# Altium PCB PCB V2.PcbDoc
Units mm, origin at the board's own origin, x right, y up, seen from the top; angles counter-clockwise.
Board outline 200 x 120 mm, 2 copper layers (Top Layer, Bottom Layer), stack 1.671 mm thick; 82 components, 75 nets, 280 pads, 100 vias.
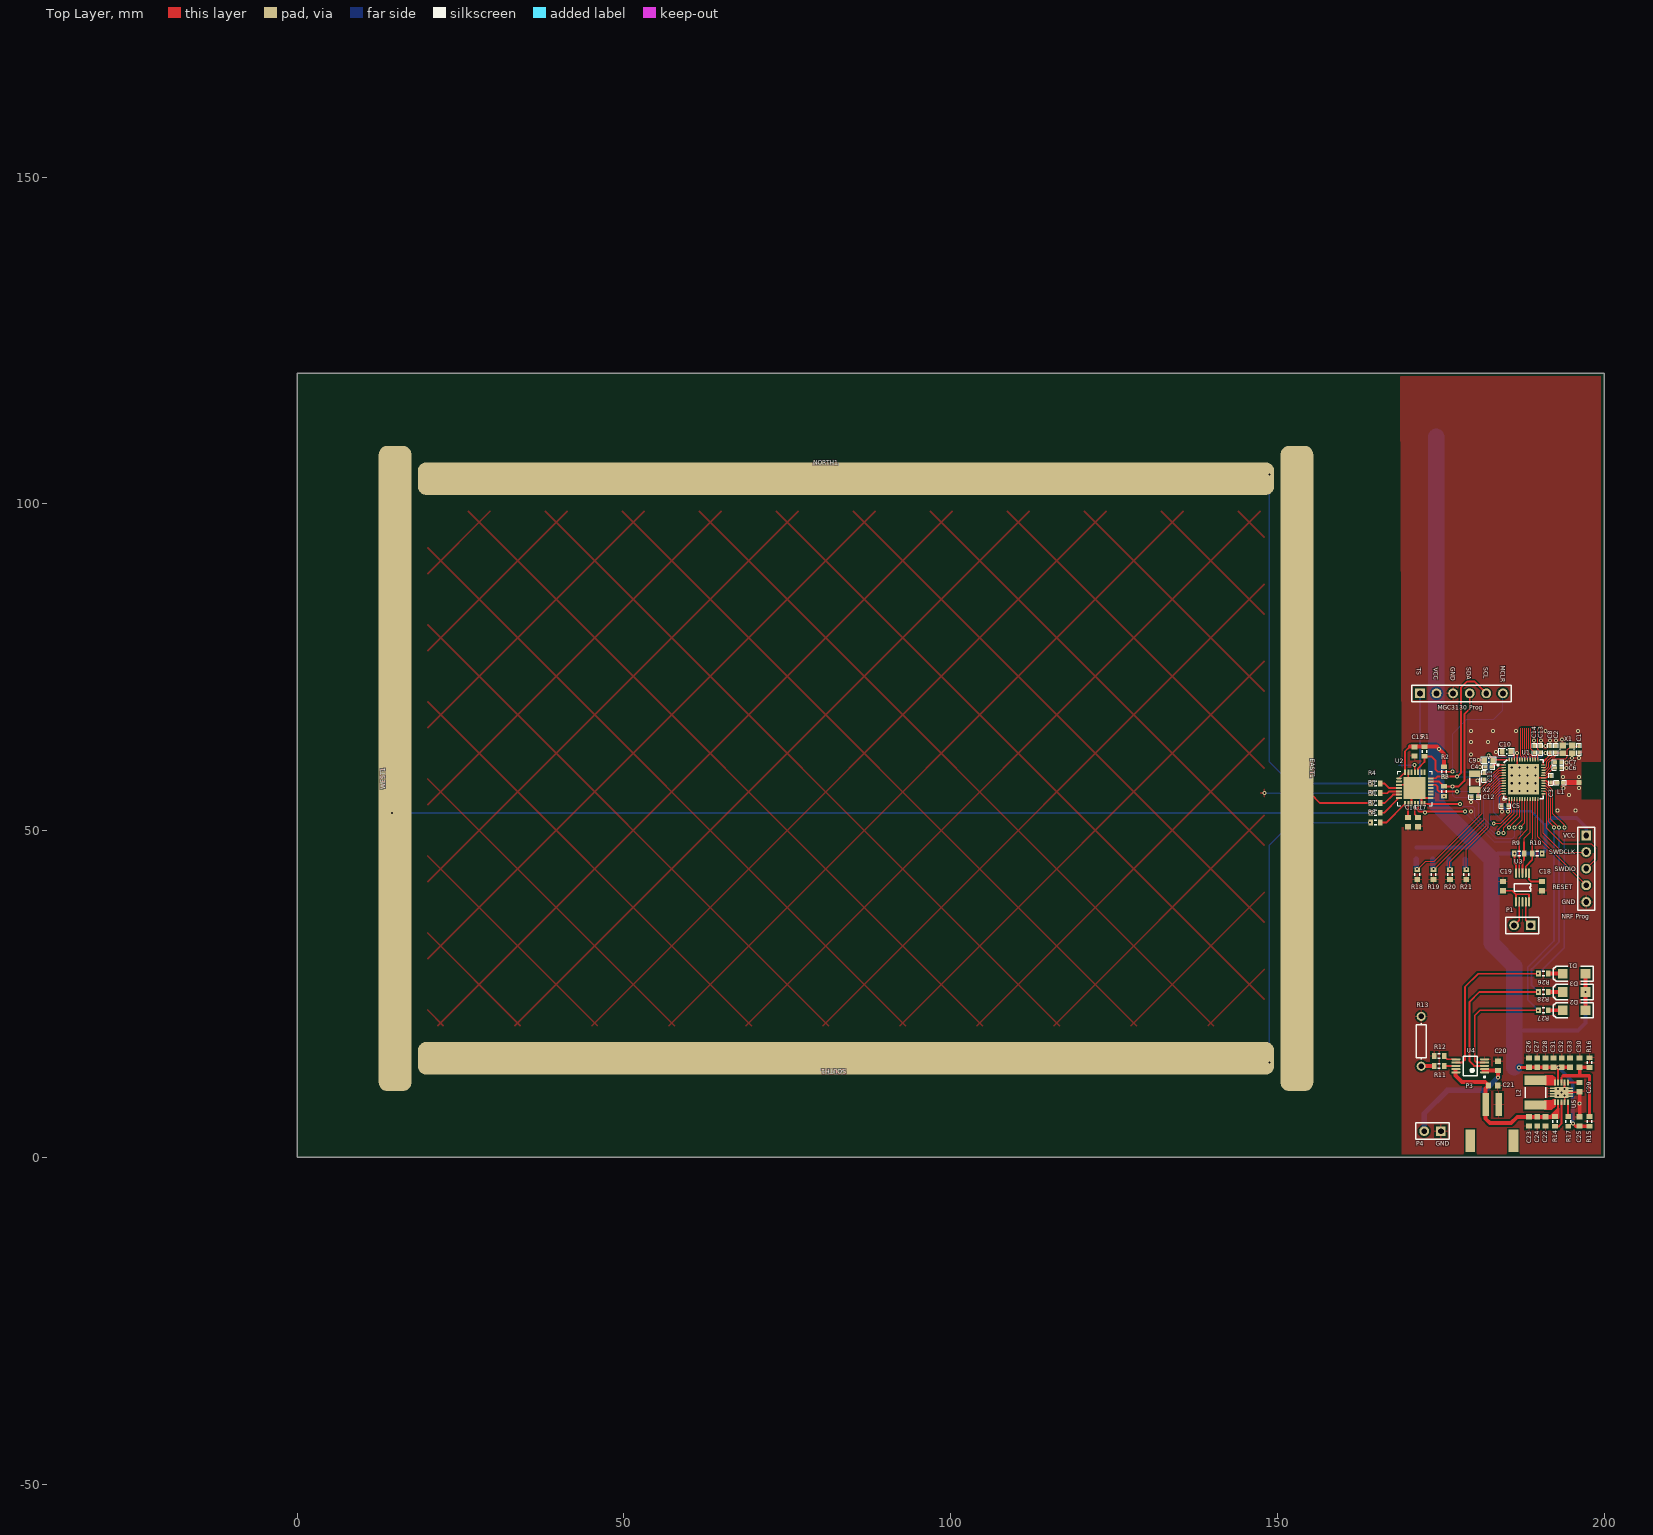
[diagram p0: Top Layer view]
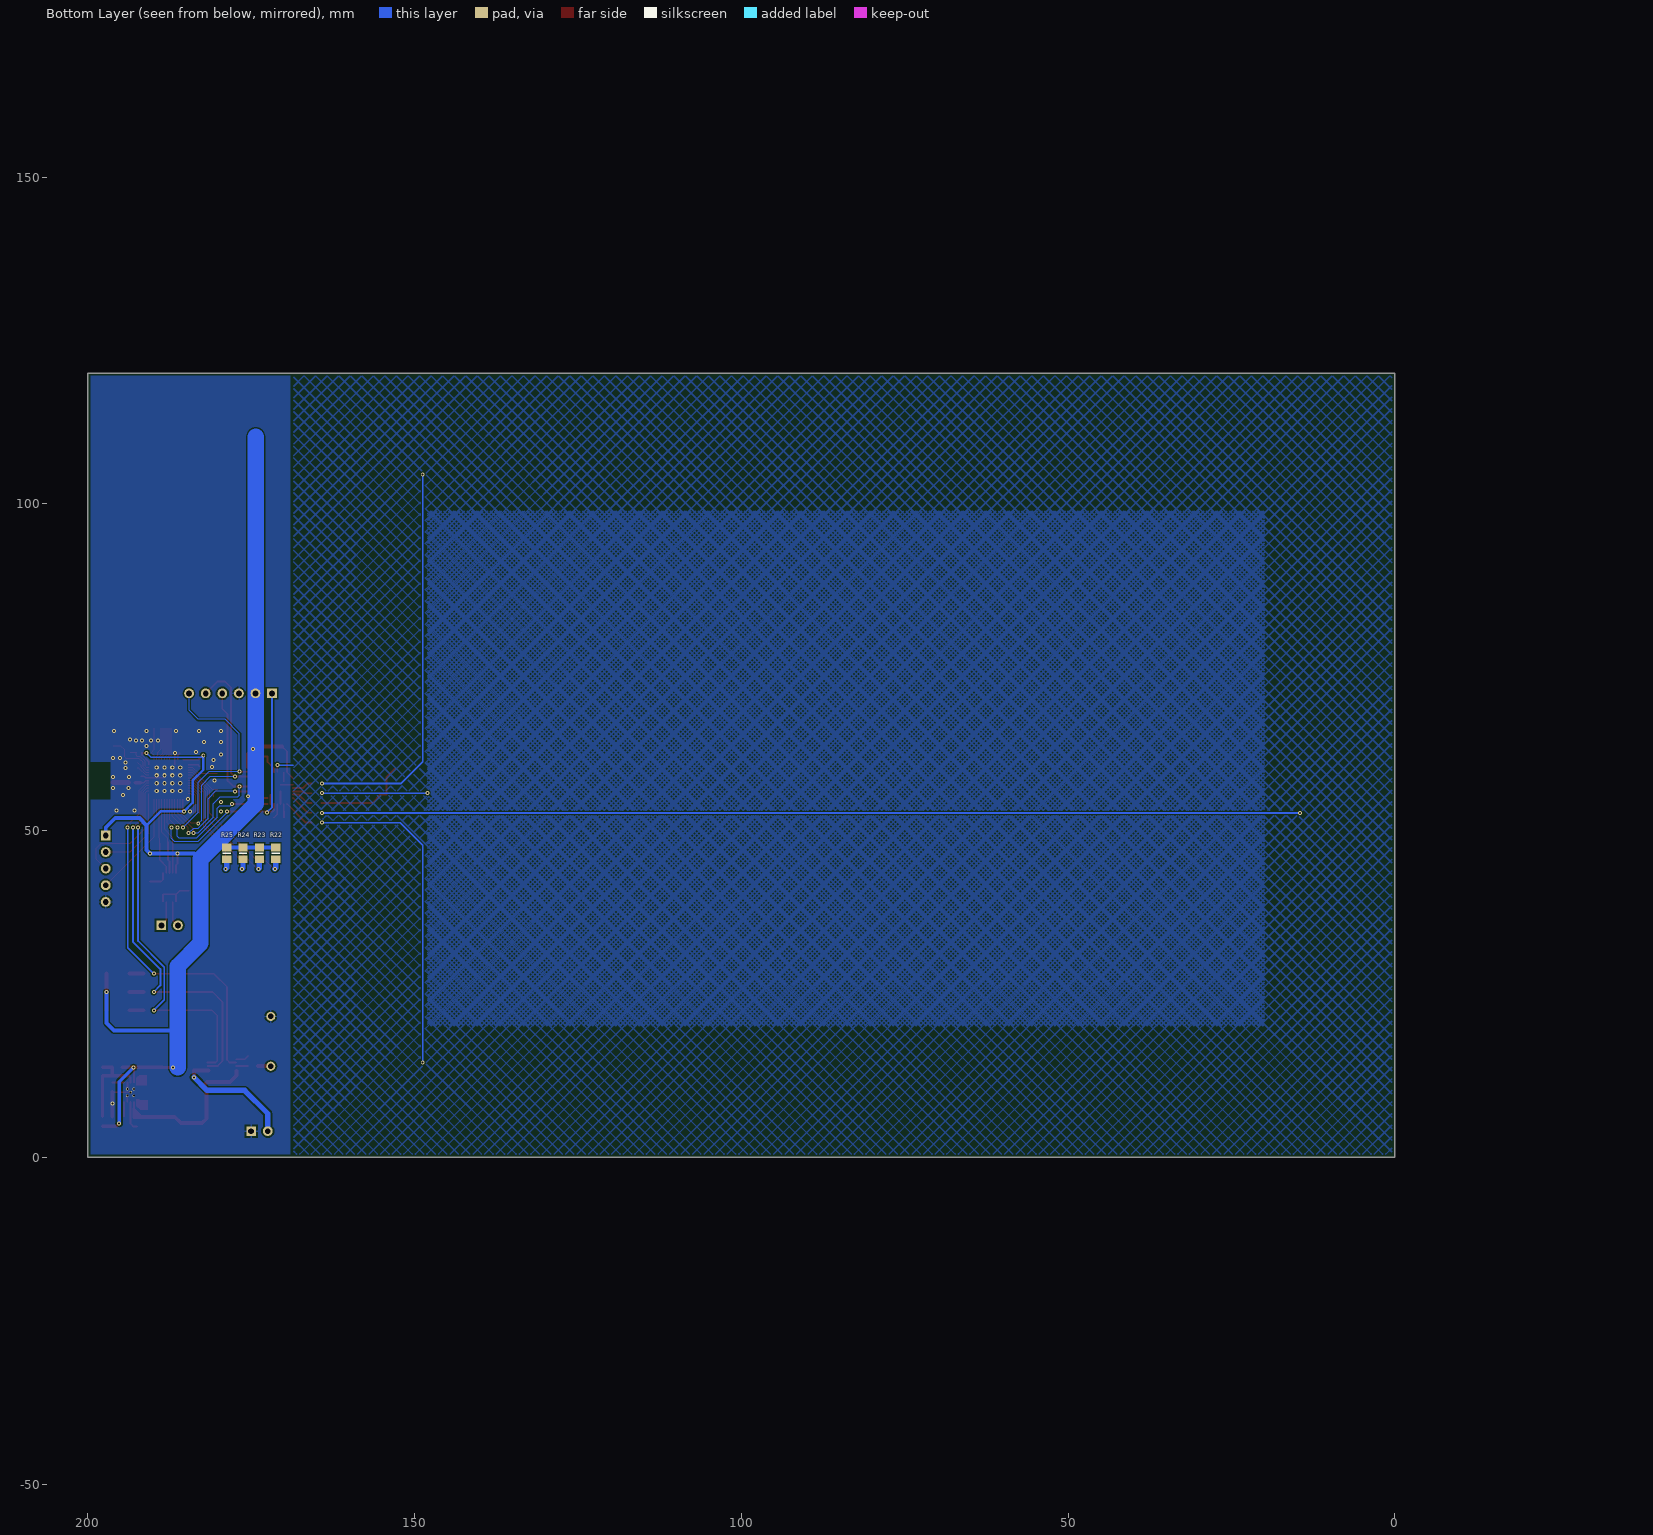
[diagram p1: Bottom Layer view, seen from below]

## Layer stack, top to bottom
Top Solder: solder mask 0.0102, Solder Resist, Dk 3.5
Top Layer: signal copper 0.0356
Dielectric1: core 1.6002, FR-4, Dk 4.8
Bottom Layer: signal copper 0.0356
Bottom Solder: solder mask 0.0102, Solder Resist, Dk 3.5

## Board outline
0,0 0,120 200,120 200,0

## Design rules (kind name [scope] priority, off if disabled: settings)
Clearance Polygon_ANT [(InNamedPolygon('Top_Layer-GND')) or (InNamedPolygon('Bottom_Layer-GND')) vs InNet('RF')] p1: gap=0.127
Clearance Polygon [(InNamedPolygon('Top_Layer-GND')) or (InNamedPolygon('Bottom_Layer-GND'))] p2: gap=0.254
Clearance [All] p3: gap=0.152
ComponentClearance [All] p1 off: gap=0.254 collisioncheckmode=3 verticalgap=0.254 showdistances=FALSE
FabricationTestPointUsage TestPointUsage [All] p1: valid=0 allowmultiple=FALSE
FabricationTestpoint Testpoint [All] p1: side=3 testpointundercomponent=TRUE minsize=1.016 maxsize=2.54 preferedsize=1.524 minholesize=0 maxholesize=1.016 preferedholesize=0.813 testpointgrid=0.025 allowsidetop=TRUE allowsidebottom=TRUE usegrid=TRUE gridtolerance=0
Height [All] p1 off: minheight=0 maxheight=25.4 prefheight=12.7
HoleSize [All] p1: absolutevalues=TRUE maxlimit=4.064 minlimit=0.305 maxpercent=80.000 minpercent=20.000
MinimumAnnularRing [All] p1 off: minimumring=0.152
PolygonConnect PolygonConnect_1 [isVia and innet(gnd)] p1: connectstyle=Direct reliefconductorwidth=0.254 reliefentries=4 polygonreliefangle="90 Angle" airgapwidth=0.254
PolygonConnect [All] p2: connectstyle=Relief reliefconductorwidth=0.254 reliefentries=4 polygonreliefangle="90 Angle" airgapwidth=0.254
RoutingVias [All] p1: holewidth=0.406 width=0.813 viastyle="Through Hole" minholewidth=0.254 minwidth=0.254 maxholewidth=0.711 maxwidth=1.27
SilkToSolderMaskClearance SilkscreenOverComponentPads [IsPad] p1: minsilkscreentomaskgap=0.254 clearancetoexposedcopper=TRUE
SolderMaskExpansion [All] p1: expansion=0.076
Width [All] p1: maxlimit=2.54 minlimit=0.152 preferedwidth=0.152
24 further rules are at their usual default settings.

## Classes and differential pairs
component class U_TPS63060: C22 C23 C24 C25 C26 C27 C28 C29 C30 C31 C32 C33 L2 R14 R15 R16 R17 U5
component class U_MCP73833: C20 C21 P3 P4 R11 R12 R13 U4
component class Overview: D1 D2 D3 "MGC3130 Prog" "NRF Prog" R18 R19 R20 R21 R22 R23 R24 R25 R26 R27 R28
component class U_DRV2605L: C18 C19 P1 R9 R10 U3
component class U_MGC3130: C15 C16 C17 EAST1 NORTH1 R1 R2 R3 R4 R5 R6 R7 R8 SOUTH1 U2 WEST1

## Components (designator, comment, footprint, x,y, rotation, side; value= is the part's Value field where it differs from the comment)
C1 "Cap Semi" CAPC1005X04L 196.152,62.437 r270 top
C2 "12pF" CAPC1005X04L 192.596,62.437 r90 top
C3 "Cap Semi" CAPC1005X04L 191.855,57.84 r270 top
C4 "Cap Semi" INDC1005X04L 182.33,59.719 r180 top
C5 "100nF" CAPC1005X04L 184.819,53.75 r180 top
C6 "N.C." CAPC1005X04L 192.947,59.567 r180 top
C7 "100pF" CAPC1005X04L 192.947,60.456 r0 top
C8 "100nF" CAPC1005X04L 191.707,62.437 r90 top
C9 "4.7µF" CAPC1608X06L 182.33,60.761 r180 top
C10 "1.0µF" CAPC1608X06L 185.077,62.056 r0 top
C11 "12pF" CAPC1005X04L 181.619,58.297 r270 top
C12 "12pF" CAPC1005X04L 180.197,55.147 r180 top
C13 "12pF" CAPC1005X04L 190.284,62.437 r90 top
C14 "12pF" CAPC1005X04L 189.319,62.44 r90 top
C15 "Cap Semi" 1608[0603] 171,62.1 r90 top
C16 "Cap Semi" 1608[0603] 170,51.3 r90 top
C17 "Cap Semi" 1608[0603] 171.5,51.3 r270 top
C18 "Cap Semi" 1608[0603] 190.5,41.5 r270 top
C19 "Cap Semi" 1608[0603] 184.5,41.5 r270 top
C20 "Cap Semi" 1608[0603] 183.75,14 r90 top
C21 "Cap Semi" 1608[0603] 183,11 r180 top
C22 "Cap Semi" 1608[0603] 191,5.5 r90 top
C23 "Cap Semi" 1608[0603] 188.5,5.5 r90 top
C24 "Cap Semi" 1608[0603] 189.75,5.5 r90 top
C25 "Cap Semi" 1608[0603] 196.25,5.5 r270 top
C26 "Cap Semi" 1608[0603] 188.5,14.5 r270 top
C27 "Cap Semi" 1608[0603] 189.75,14.5 r270 top
C28 "Cap Semi" 1608[0603] 191,14.5 r270 top
C29 "Cap Semi" 1608[0603] 196.25,10.75 r90 top
C30 "Cap Semi" 1608[0603] 196.25,14.5 r270 top
C31 "Cap Semi" 1608[0603] 192.25,14.5 r270 top
C32 "Cap Semi" 1608[0603] 193.5,14.5 r270 top
C33 "Cap Semi" 1608[0603] 194.75,14.5 r270 top
D1 "LED2" 3.2X1.6X1.1 195.4,28.1 r180 top
D2 "LED2" 3.2X1.6X1.1 195.4,22.5 r180 top
D3 "LED2" 3.2X1.6X1.1 195.4,25.3 r180 top
EAST1 "Antenna" "Vertical Electrode"#1 152.988,58.504 r0 top
L1 "3.9nH" INDC1005X04L 193.278,57.332 r0 top
L2 "Inductor" INDC4532 189.492,9.893 r90 top
"MGC3130 Prog" "MGC3130 Programming Header" HDR1X6 171.8,71 r0 top (schematic designator P5)
NORTH1 "Antenna" "Horizontal Electrode"#1 82.988,106.504 r180 top
"NRF Prog" "Programming Header" HDR1X5 197.25,49.25 r270 top (schematic designator P2)
P1 "Vibration Motor" HDR1X2 188.75,35.5 r180 top
P3 "Header 2" JST-PH-2 180.25,4.25 r0 top
P4 "Header 2" HDR1X2 175,4 r180 top
R1 "Res3" J1-0603 172.5,62.1 r90 top
R2 "Res3" J1-0603 175.5,59 r90 top
R3 "Res3" J1-0603 175.5,56 r270 top
R4 "Res3" J1-0603 165,57.219 r0 top
R5 "Res3" J1-0603 165,55.719 r0 top
R6 "Res3" J1-0603 165,54.219 r0 top
R7 "Res3" J1-0603 165,52.719 r0 top
R8 "Res3" J1-0603 165,51.219 r0 top
R9 "Res3" J1-0603 187,46.5 r180 top
R10 "Res3" J1-0603 189.75,46.5 r0 top
R11 "Res3" J1-0603 174.75,14 r180 top
R12 "Res3" J1-0603 174.75,15.5 r0 top
R13 "NTC Thermistor" AXIAL-0.3 172,17.75 r270 top
R14 "Res3" J1-0603 192.5,5.5 r270 top
R15 "Res3" J1-0603 197.75,5.5 r270 top
R16 "Res3" J1-0603 197.75,14.5 r270 top
R17 "Res3" J1-0603 194.5,5.5 r270 top
R18 "Res3" J1-0603 171.393,43.258 r90 top
R19 "Res3" J1-0603 173.893,43.258 r90 top
R20 "Res3" J1-0603 176.393,43.258 r90 top
R21 "Res3" J1-0603 178.893,43.258 r90 top
R22 "Strain" 6-0805_N 171.25,46.5 r270 bottom
R23 "Strain" 6-0805_N 173.75,46.5 r270 bottom
R24 "Strain" 6-0805_N 176.25,46.5 r270 bottom
R25 "Strain" 6-0805_N 178.75,46.5 r270 bottom
R26 "Res3" J1-0603 190.7,28.1 r180 top
R27 "Res3" J1-0603 190.7,22.5 r180 top
R28 "Res3" J1-0603 190.7,25.3 r180 top
SOUTH1 "Antenna" "Horizontal Electrode"#2 82.488,12.504 r180 top
U1 "MGC3130" QFN40P600X600X90-48N 187.664,57.84 r0 top locked
U2 "MGC3130" QFN28 171,56.5 r0 top
U3 "DRV2605L" DRV2605L 188.5,43.5 r270 top
U4 "MCP73833" TSSOP50P490X110-10N 179.5,14 r180 top
U5 "TPS63060" S-PSWON-N10 193.45,9.95 r0 top
WEST1 "Antenna" "Vertical Electrode"#2 16.988,57.004 r0 top
X1 "32MHz" BT-XTAL_2016 194.374,62.437 r180 top
X2 "32.768kHz" XTAL_3215 180.197,57.459 r270 top

## Footprints (in the part's own frame and the unit in brackets; to place one, negate y for a bottom-side part, rotate by r counter-clockwise, add the part's x,y. Pads: shape width x height; smd on the part's side, far side on the other; paste and mask are expansions set on the pad)
3.2X1.6X1.1 [mm] "SMT LED; 2 Flat Leads"
  rect 1.5x1.5 smd: 1(-1.75,0) 2(1.75,0)
  silkscreen extent -2.9,-1.15 3.2,1.15
6-0805_N [mm] "Chip Resistor, Body 2.0x1.2mm, IPC Medium Density"
  rect 1.2x1.4 smd: 1(-0.9,0) 2(0.9,0)
  silkscreen extent 0,-0.6 0,0.6, body extent -1.07,-0.7 1.07,0.7, height 0.7
1608[0603] [mm] "Chip Capacitor, Body 1.6x0.8mm, IPC High Density"
  rect 0.8x0.9 smd: 1(-0.7,0) 2(0.7,0)
  body extent -0.87,-0.48 0.87,0.48, height 1.3
AXIAL-0.3 [mm] "Axial Device, Thru-Hole; 2 Leads; 0.3 in Pin Spacing"
  round 1.4 hole 0.85: 1(-3.81,0) 2(3.81,0)
  silkscreen extent -2.77,-0.76 2.77,0.76
BT-XTAL_2016 [mm] "Crystal 2.0 x 1.6 mm"
  rect 0.95x0.85 smd: 1(-0.725,-0.575) 2(0.725,-0.575) 3(0.725,0.575) 4(-0.725,0.575)
  silkscreen extent -1.08,-0.88 1.08,0.88
CAPC1005X04L [mm] "Chip Capacitor, Body 1.6x0.8mm, IPC High Density"
  rect 0.6x0.5 smd: 1(-0.5,0) 2(0.5,0)
  silkscreen extent -0.9,-0.35 0.9,0.35, body extent -0.51,-0.25 0.51,0.25, height 0.5
CAPC1608X06L [mm] "Chip Capacitor, 2-Leads, Body 1.6x0.8mm, IPC High Density"
  rect 0.75x0.8 smd: 1(-0.675,0) 2(0.675,0)
  silkscreen extent -1.17,-0.5 1.17,0.5, body extent -0.8,-0.43 0.8,0.43, height 0.8
DRV2605L [mm]
  rect 1.45x0.3 smd: 1(0,0)
  oval 1.45x0.3 smd: 2(0,-0.5) 3(0,-1) 4(0,-1.5) 5(0,-2) 6(4.4,-2) 7(4.4,-1.5) 8(4.4,-1) 9(4.4,-0.5) 10(4.4,0)
  silkscreen extent 1.61,-2.25 2.79,0.25
HDR1X2 [mm] "Connector; Header; 2 Position"
  rect 1.5x1.5 hole 0.9: 1(0,0)
  round 1.5 hole 0.9: 2(2.54,0)
  silkscreen extent -1.27,-1.27 3.81,1.27
HDR1X5 [mm] "Connector; Header; 5 Position"
  rect 1.5x1.5 hole 0.9: 1(0,0)
  round 1.5 hole 0.9: 2(2.54,0) 3(5.08,0) 4(7.62,0) 5(10.16,0)
  silkscreen extent -1.27,-1.27 11.43,1.27
HDR1X6 [mm] "Connector; Header; 6 Position"
  rect 1.5x1.5 hole 0.9: 1(0,0)
  round 1.5 hole 0.9: 2(2.54,0) 3(5.08,0) 4(7.62,0) 5(10.16,0) 6(12.7,0)
  silkscreen extent -1.27,-1.27 13.97,1.27
"Horizontal Electrode"#1 [mm]
  rrect50% 131x5 smd paste+0 mask-300: 1(-1,2.65)
"Horizontal Electrode"#2 [mm]
  rrect50% 131x5 smd paste+0 mask-300: 1(-1.5,-2.65)
INDC1005X04L [mm] "Chip Capacitor, Body 1.6x0.8mm, IPC High Density"
  rect 0.65x0.5 smd: 1(-0.475,0) 2(0.475,0)
  silkscreen extent -0.9,-0.35 0.9,0.35, body extent -0.5,-0.3 0.5,0.3, height 0.5
INDC4532 [mm] "Chip Inductor, Body 4.5x3.2mm, IPC High Density"
  rect 1.4x3.3 smd: 1(-1.9,0) 2(1.9,0)
  silkscreen extent -0.8,-1.55 0.8,1.55, body extent -2.4,-1.7 2.4,1.7, height 0.55
J1-0603 [mm] "Chip Resistor, Body 1.6x0.8mm, IPC High Density"
  rect 0.7x0.9 smd: 1(-0.75,0) 2(0.75,0)
  silkscreen extent -0.2,-0.35 0.2,0.35, body extent -0.85,-0.48 0.85,0.48, height 0.9
JST-PH-2 [mm]
  rect 1x3.5 smd: 1(1.6,3.85) 2(3.6,3.85)
  rect 1.5x3.4 smd: ""(-0.75,-1.7) ""(5.85,-1.7)
QFN28 [mm]
  oval 0.85x0.3 smd: 1(-2.4,1.5)
  rect 0.85x0.3 smd: 2(-2.4,1) 3(-2.4,0.5) 4(-2.4,0) 5(-2.4,-0.5) 6(-2.4,-1) 7(-2.4,-1.5) 15(2.45,-1.5) 16(2.45,-1) 17(2.45,-0.5) 18(2.45,0) 19(2.45,0.5) 20(2.45,1) 21(2.45,1.5)
  rect 0.3x0.85 smd: 8(-1.475,-2.425) 9(-0.975,-2.425) 10(-0.475,-2.425) 11(0.025,-2.425) 12(0.525,-2.425) 13(1.025,-2.425) 14(1.525,-2.425) 22(1.525,2.425) 23(1.025,2.425) 24(0.525,2.425) 25(0.025,2.425) 26(-0.475,2.425) 27(-0.975,2.425) 28(-1.475,2.425)
  rect 3.35x3.35 smd: 29(0,0)
  rrect50% 0.3x0.3 on Top Overlay: ""(-3,3)
  silkscreen extent -2.6,-2.7 2.7,2.6
QFN40P600X600X90-48N [mm] "QFN, 48-Leads, Body 6,0x6,0mm (max), Pitch 0,40mm, IPC Medium Density"
  oval 0.65x0.2 smd: 1(-3.025,2.2) 2(-3.025,1.8) 3(-3.025,1.4) 4(-3.025,1) 5(-3.025,0.6) 6(-3.025,0.2) 7(-3.025,-0.2) 8(-3.025,-0.6) 9(-3.025,-1) 10(-3.025,-1.4) 11(-3.025,-1.8) 12(-3.025,-2.2) 25(3.025,-2.2) 26(3.025,-1.8) 27(3.025,-1.4) 28(3.025,-1) 29(3.025,-0.6) 30(3.025,-0.2) 31(3.025,0.2) 32(3.025,0.6) 33(3.025,1) 34(3.025,1.4) 35(3.025,1.8) 36(3.025,2.2)
  oval 0.2x0.65 smd: 13(-2.2,-3.025) 14(-1.8,-3.025) 15(-1.4,-3.025) 16(-1,-3.025) 17(-0.6,-3.025) 18(-0.2,-3.025) 19(0.2,-3.025) 20(0.6,-3.025) 21(1,-3.025) 22(1.4,-3.025) 23(1.8,-3.025) 24(2.2,-3.025) 37(2.2,3.025) 38(1.8,3.025) 39(1.4,3.025) 40(1,3.025) 41(0.6,3.025) 42(0.2,3.025) 43(-0.2,3.025) 44(-0.6,3.025) 45(-1,3.025) 46(-1.4,3.025) 47(-1.8,3.025) 48(-2.2,3.025)
  rect 4.7x4.7 smd: 49(0,0)
  silkscreen extent -4.02,-3 3,3, body extent -3.02,-3.02 3.02,3.02, height 0.86
S-PSWON-N10 [mm]
  rect 0.28x0.85 smd: 1(-1,-1.5) 2(-0.5,-1.5) 3(0,-1.5) 4(0.5,-1.5) 5(1,-1.5) 6(1,1.5) 7(0.5,1.5) 8(0,1.5) 9(-0.5,1.5) 10(-1,1.5)
  rect 0.7x0.25 smd: 11(-1.4,-0.6) 11(-1.4,-0.2) 11(-1.4,0.2) 11(-1.4,0.6) 11(1.4,-0.6) 11(1.4,-0.2) 11(1.4,0.2) 11(1.4,0.6)
  rect 2.15x1.7 smd: 11(0,0)
TSSOP50P490X110-10N [mm] "TSSOP, 10-Leads, Body 3.00x3.00mm, Pitch 0.50mm, IPC Medium Density"
  oval 1.4x0.3 smd: 1(-2.2,1) 2(-2.2,0.5) 3(-2.2,0) 4(-2.2,-0.5) 5(-2.2,-1) 6(2.2,-1) 7(2.2,-0.5) 8(2.2,0) 9(2.2,0.5) 10(2.2,1)
  silkscreen extent -2.33,-1.5 1.1,1.82, body extent -1.5,-1.5 1.5,1.5, height 1.1
"Vertical Electrode"#1 [mm]
  rrect50% 5x98.7 smd paste+0 mask-300: 1(0,1)
"Vertical Electrode"#2 [mm]
  rrect50% 5x98.7 smd paste-300 mask-300: 1(-2,2.5)
XTAL_3215 [mm] "XTAL SMD 3.2 x 1.5 mm"
  rect 1x1.8 smd: 1(-1.25,0) 2(1.25,0)
  silkscreen extent -0.6,-0.75 0.6,0.75, body extent -1.6,-0.75 1.6,0.75, height 0.81

## Part data
C1 C2 C11 C12 C13 C14: library part C0402-12p, "Capacitor, NP0, ±2%"
C3: library part C0402-0.8p, "Capacitor, NP0, ±5%"
C4 C5 C8: library part C0402-100n, "Capacitor, X7R, ±10%"
C6: library part C0402-N.C., "Not mounted"
C7: library part C0402-100p, "Capacitor, NP0, ±5%"
C9: library part C0603-4µ7, "Capacitor, X5R, ±10%"
C10: library part C0603-1µ0, "Capacitor, X7R, ±10%"
C15 C16 C17 C18 C19 C20 C21 C22 C23 C24 C25 C26 C27 C28 C29 C30 C31 C32 C33: "Capacitor (Semiconductor SIM Model)"
D1 D2 D3: "Typical RED, GREEN, YELLOW, AMBER GaAs LED"
EAST1: library part "East Antenna"
L1: library part L0402-3n9, "High frequency chip inductor ±5%"
"MGC3130 Prog": library part "Header 6", "Header, 6-Pin"
NORTH1: library part "North Antenna"
"NRF Prog": library part "Header 5", "Header, 5-Pin"
P1: library part "Header 2", "Header, 2-Pin"
P3 P4: "Header, 2-Pin"
R1 R2 R3 R4 R5 R6 R7 R8 R9 R10 R11 R12 R14 R15 R16 R17 R18 R19 R20 R21 R26 R27 R28: "Resistor"
R13: library part Res1, "Resistor"
R22 R23 R24 R25: library part "Res Varistor", "Varistor (Voltage-Sensitive Resistor)"
SOUTH1: library part "South Antenna"
U1: library part nRF52832-QFAA, "Multi-protocol Bluetooth Low Energy, ANT and 2.4GHz proprietary system-on-chip"
U2: "Gesture Recognition IC"
WEST1: library part "West Antenna"
X1: library part XTAL_SMD2016_32MHz_8pF_General, "XTAL SMD 2016, 32MHz, Cl=8pF, Total Tol: ±40ppm"
X2: library part XTAL_SMD3215_32.768kHz_9pF_General, "XTAL SMD 3215, 32.768kHz, Cl=9pF, Total Tol: ±50ppm"

## Free pads (board coordinates)
  rect 0.762x0.762 smd: 0(196.166,57.338)

## Via types
v1: diameter 0.61, hole 0.305, Top Layer to Bottom Layer, tented both sides, 79 vias
v2: diameter 0.66, hole 0.33, Top Layer to Bottom Layer, tented both sides, 16 vias
v3: diameter 0.4, hole 0.3, Top Layer to Bottom Layer, 5 vias

## Nets (pads, with @x,y where several pads share a name; then routed paths per layer and width w, separated by ;. In a path a pad name is that pad's centre, name@x,y a point inside that pad or via, vN(x,y) a via of type N, cw(c..) or ccw(c..) an arc to the next point about the centre after c; other vN are vias at no path point)
+5V: C20.1 P4.2 U4.1 U4.2 | length 19.6
  Top Layer w0.6: 181.5,13.25 181.55,13.3 C20.1 v1(183.75,12.25)
  Bottom Layer w0.8: P4.2 172.46,6.71 176,10.25 181.75,10.25 v1(183.75,12.25)
DEC1: C4.1 U1.1 | length 1.9
  Top Layer w0.203: C4.1@182.834,59.739 183.135,60.04 U1.1
DEC2: C6.2 U1.32 | length 2.2
  Top Layer w0.152: U1.32 191.075,58.44 192.203,59.567 C6.2@192.465,59.567
DEC3: C7.1 U1.33 | length 2.4
  Top Layer w0.152: U1.33 191.044,58.84 191.855,59.651 191.855,59.902 C7.1@192.339,60.386
DEC4: C10.2 U1.46 | length 1.2
  Top Layer w0.229: C10.2@185.854,61.909 186.264,61.499 U1.46
GND: "MGC3130 Prog.3" "NRF Prog.5" C1.2 C2.2 C3.1 C4.2 C5.2 C6.1 C7.2 C8.2 C9.2 C10.1 C11.2 C12.2 C13.2 C14.2 C15.1 C16.1 C17.2 C18.2 C19.1 C20.2 C21.1 C22.1 C23.1 C24.1 C25.1 C26.1 C27.1 C28.1 C29.1 C30.1 C31.1 C32.1 C33.1 P3.2 P4.1 R12.1 R13.1 R16.1 R18.1 R19.1 R20.1 R21.1 U1.31 U1.45 U1.49 U2.3 U2.10 U2.13 U2.15 U2.27 U2.29 U3.8 U4.5 U5.4 U5.7 U5.11 X1.2 X1.4 | length 21.9
  Top Layer w0.229: U1.49@186.664,60.04 U1.45 v1@186.664,61.904 ; U1.49@188.282,58.043 191.163,58.043 191.45,58.33 C3.1@191.863,58.33 ; v3(193.45,9.95) 196.15,9.95 C29.1 ; U5.4 v3(193.95,9.45)
  Top Layer w0.28: U2.3 U2.29@170.5,57 ; U2.29@170.025,57.475 U2.27 ; U2.10 U2.29@170.525,56.025 ; U2.13 U2.29@172.025,55.475 ; U2.29@172.5,55 U2.15 ; v3(193.95,10.45) U5.7
  Top Layer w0.5: C25.1 C29.1
  other v1: 196.25,8.25 184.337,52.912 179.638,52.938 192.82,53.039 195.614,53.039 179.638,54.335 184.667,54.84 194.649,55.452 193.76,56.494 196.166,56.5 180.578,57.637 196.166,58.176 193.688,58.189 194.243,59.567 181.009,59.745 194.243,60.405 180.755,60.761 195.11,61.074 196.152,61.125 179.638,61.624 186.678,61.904 183.452,62.056 190.995,62.945 179.638,63.529 182.254,63.529 189.268,63.758 190.335,63.758 191.707,63.758 192.596,63.758 193.535,63.961 179.638,65.257 182.991,65.257 186.496,65.257 190.996,65.257 195.999,65.257
  other v2: 185.864,56.04 187.064,56.04 188.264,56.04 189.464,56.04 185.864,57.24 187.064,57.24 188.264,57.24 189.464,57.24 185.864,58.44 187.064,58.44 188.264,58.44 189.464,58.44 185.864,59.64 187.064,59.64 188.264,59.64 189.464,59.64
  other v3: 192.95,9.45 192.95,10.45
NetC3_2: C3.2 L1.1 U1.30 | length 2.2
  Top Layer w0.229: U1.30 191.164,57.64 191.474,57.33 C3.2@191.863,57.33
  Top Layer w0.508: C3.2@191.855,57.335 L1.1@192.752,57.335
NetC16_2: C16.2 U2.9 | length 2.1
  Top Layer w0.28: C16.2 U2.9
NetC17_1: C17.1 U2.11 | length 2.3
  Top Layer w0.28: U2.11 171.025,52.475 C17.1
NetC18_1: C18.1 U3.1 | length 3.1
  Top Layer w0.28: U3.1 188.5,42.5 188.8,42.2 C18.1
NetC19_2: C19.2 U3.6 U3.10 | length 6.5
  Top Layer w0.28: C19.2 185.95,40.8 186.5,40.25 ; U3.6 186.5,40.25 ; U3.10 188.5,40.25 186.5,40.25
NetC29_2: C29.2 U5.6 | length 1.8
  Top Layer w0.3: U5.6 C29.2
NetC30_2: C30.2 R15.1 R16.2 U5.8 | length 14.2
  Top Layer w0.28: U5.8 193.45,12.2 193.75,12.5
  Top Layer w0.5: 193.75,12.5 197.75,12.5 R15.1 ; 196.25,12.5 C30.2 R16.2@197.7,13.8
NetCENTER1_1: R5.1 | length 16.1
  Bottom Layer w0.28: v1@148.031,55.719 v1(164.15,55.719)
  other v1: 148,55.75
NetD1_2: D1.2 R26.1 | length 2.2
  Top Layer w0.6: R26.1 D1.2
NetD2_2: D2.2 R27.1 | length 2.2
  Top Layer w0.6: R27.1 D2.2
NetD3_2: D3.2 R28.1 | length 2.2
  Top Layer w0.6: R28.1 D3.2
NetEAST1_1: EAST1.1 R6.1 | length 15
  Top Layer w0.28: EAST1.1 154.309,58.183 154.309,55.54 155.16,55.54 156.481,54.219 R6.1
NetL2_1: L2.1 U5.1
NetL2_2: L2.2 U5.10
NetNORTH1_1: NORTH1.1 R4.1 | length 60.8
  Bottom Layer w0.28: v1(148.75,104.5) 148.75,60.5 152.031,57.219 v1(164.15,57.219)
NetP1_1: P1.1 U3.9 | length 3.9
  Top Layer w0.28: U3.9 188,36.25 P1.1
NetP1_2: P1.2 U3.7 | length 3.9
  Top Layer w0.28: P1.2 187,36.29 U3.7
NetR4_2: R4.2 U2.4 | length 3.1
  Top Layer w0.28: R4.2 166.361,57.219 167.081,56.5 U2.4
NetR5_2: R5.2 U2.5 | length 3
  Top Layer w0.28: R5.2 166.819,55.719 167.1,56 U2.5
NetR6_2: R6.2 U2.6 | length 3.4
  Top Layer w0.28: R6.2 166.419,54.219 167.7,55.5 U2.6
NetR7_1: R7.1 WEST1.1 | length 149.6
  Bottom Layer w0.28: v1(14.55,52.7) v1(164.15,52.7)
NetR7_2: R7.2 U2.7 | length 3.8
  Top Layer w0.28: R7.2 166.319,52.719 U2.7
NetR8_1: R8.1 SOUTH1.1 | length 50.1
  Bottom Layer w0.28: v1(148.75,14.5) 148.75,47.75 152.2,51.2 v1(164.15,51.2)
NetR8_2: R8.2 U2.8 | length 5
  Top Layer w0.28: R8.2 166.669,51.219 U2.8
NetR11_1: R11.1 U4.8 | length 1.8
  Top Layer w0.28: R11.1 U4.8
NetR11_2: R11.2 R13.2 | length 1.9
  Top Layer w0.6: R13.2@172.06,14 R11.2
NetR12_2: R12.2 U4.6 | length 2
  Top Layer w0.28: R12.2 176,15 U4.6
NetR14_2: R14.2 U5.3 | length 4.4
  Top Layer w0.3: R14.2 193.05,4.75 193.45,5.15 U5.3
NetR17_1: R17.1 U5.5 | length 2.2
  Top Layer w0.3: R17.1@194.45,6.225 U5.5
NetTRANSMIT1_1: U2.25 | length 3.5
  Top Layer w0.28: U2.25 v1@171.025,59.975
  Bottom Layer w0.28: 168.6,60 v1(171,60)
P0.00/XL1: C11.1 U1.2 X2.1 | length 4.8
  Top Layer w0.152: X2.1 182.981,58.709 183.912,59.64 U1.2
P0.01/XL2: C12.1 U1.3 X2.2 | length 7
  Top Layer w0.152: C12.1 180.697,55.709 X2.2 180.912,56.209 183.943,59.24 U1.3
P0.02/AIN0: R18.2 R22.2 U1.4 | length 23
  Top Layer w0.152: R18.2 172.685,45.3 174.027,45.3 181.34,52.612 181.34,56.204 183.975,58.84 U1.4
  Bottom Layer w0.8: R22.2 171.25,44.252 v1(171.393,44.108)
P0.03/AIN1: R19.2 R23.2 U1.5 | length 20.8
  Top Layer w0.152: R19.2 181.645,51.76 181.645,56.078 184.007,58.44 U1.5
  Bottom Layer w0.8: R23.2 173.75,44.252 v1(173.893,44.108)
P0.04/AIN2: R20.2 R24.2 U1.6 | length 19.4
  Top Layer w0.152: R20.2 v1(176.393,44.108) 176.393,45.193 181.95,50.75 181.95,55.951 184.039,58.04 U1.6
  Bottom Layer w0.8: R24.2 176.25,44.252 v1(176.393,44.108)
P0.05/AIN3: R21.2 R25.2 U1.7 | length 17.9
  Top Layer w0.152: R21.2 178.893,47.143 182.258,50.508 182.258,55.824 184.074,57.64 U1.7
  Bottom Layer w0.8: R25.2 178.75,44.252 v1(178.893,44.108)
P0.06: U1.8 | length 5.8
  Top Layer w0.152: 182.563,52.612 182.563,55.698 184.105,57.24 U1.8
P0.07: U1.9 | length 5.3
  Top Layer w0.152: 182.867,52.612 182.867,55.571 184.136,56.84 U1.9
P0.08: U1.10 | length 4.7
  Top Layer w0.152: 183.172,52.612 183.172,55.445 184.167,56.44 U1.10
P0.09: U1.11 | length 4.2
  Top Layer w0.152: 183.477,52.612 183.477,55.319 184.198,56.04 U1.11
P0.10: U1.12 | length 3.6
  Top Layer w0.152: 183.782,52.612 183.782,55.193 184.229,55.64 U1.12
P0.11: "MGC3130 Prog.5" R2.1 U1.14 U2.21 | length 40.2
  Top Layer w0.152: v1(183.1,51.1) 184.2,51.1 185.864,52.764 U1.14
  Top Layer w0.28: U2.21 174.2,58 174.45,58.25 R2.1 v1(177.5,58.25) 178.1,58.85 178.1,71.9 179,72.8 180.16,72.8 181.96,71
  Bottom Layer w0.152: v1(177.5,58.25) 181.319,58.25 182.6,56.969 182.6,51.6 v1(183.1,51.1)
P0.12: "MGC3130 Prog.4" R3.1 U1.15 U2.20 | length 37.8
  Top Layer w0.152: v1(183.8,49.6) 183.8,50.2 186.264,52.664 U1.15
  Top Layer w0.28: U2.20 174.75,57.5 R3.1 v1(176.8,56.75) 177.75,56.75 178.6,57.6 178.6,67.8 179.42,68.62 179.42,71
  Bottom Layer w0.152: v1(176.8,56.75) 176.8,55.4 177.1,55.1 179.8,55.1 180.8,54.1 180.8,52 183.2,49.6 v1(183.8,49.6)
P0.13: U1.16 U2.19 | length 22.4
  Top Layer w0.152: v1(184.6,49.6) 184.6,50.454 186.664,52.519 U1.16
  Top Layer w0.28: U2.19 174.2,57 174.5,56.7 174.5,56.2 174.7,56 v1(177.5,56)
  Bottom Layer w0.152: v1(177.5,56) 180.5,56 181.6,54.9 181.6,51.846 183.146,50.3 183.9,50.3 v1(184.6,49.6)
P0.14: "MGC3130 Prog.6" R1.1 U1.17 U2.24 | length 46.4
  Top Layer w0.152: v1(185.4,50.5) 187.064,52.164 U1.17
  Top Layer w0.28: U2.24 171.525,59.525 172.5,60.5 R1.1 173.55,61.35 174.2,60.7 174.2,59.3 174.5,59 v1(176.8,59) v1@176.9,59
  Bottom Layer w0.152: 184.5,71 184.5,68.4 183.1,67 179,67 176.8,64.8 v1(176.8,59) 181.5,59 183.1,57.4 183.1,52.8 v1(185.4,50.5)
P0.15: U1.18 U2.14 | length 23.1
  Top Layer w0.152: v1(186.3,50.5) 187.464,51.664 U1.18
  Top Layer w0.28: U2.14 v1@177.9,54.075
  Bottom Layer w0.152: v1(177.9,54.1) 178.3,53.7 179.9,53.7 180.2,53.4 180.2,52 183.4,48.8 186,48.8 186.3,49.1 v1(186.3,50.5)
P0.16: "MGC3130 Prog.1" U1.19 U2.12 | length 43.7
  Top Layer w0.152: v1(187.2,50.5) 187.864,51.164 U1.19
  Top Layer w0.28: U2.12 171.525,53.075 171.7,52.9 v1(178.7,52.9)
  Bottom Layer w0.152: v1(178.7,52.9) 178.7,52.8 183.2,48.3 186.7,48.3 187.2,48.8 v1(187.2,50.5)
  Bottom Layer w0.28: 171.8,71 171.8,53.6 v1(172.6,52.8)
P0.17: U1.20 U3.4 | length 11.8
  Top Layer w0.152: 187,48.1 187,48.9 188.264,50.164 U1.20
  Top Layer w0.28: U3.4 187,48.1
P0.18: R9.1 U1.21 U3.3 | length 11.8
  Top Layer w0.152: 187.75,48.25 187.75,48.85 188.664,49.764 U1.21
  Top Layer w0.28: U3.3 187.5,45.25 187.75,45.5 187.75,48.25
P0.19: R10.1 U1.22 U3.2 | length 11.8
  Top Layer w0.152: 189,48 189,48.75 189.064,48.814 U1.22
  Top Layer w0.28: U3.2 188,44.5 189,45.5 R10.1 189,48
P0.20: U1.23 | length 2.2
  Top Layer w0.152: 189.464,52.607 U1.23
P0.21: "NRF Prog.4" U1.24 | length 16.2
  Top Layer w0.152: U1.24 189.864,49.016 197.25,41.63
P0.22: R27.2 U1.27 U4.4 | length 55.6
  Top Layer w0.152: U1.27 191.013,56.44 191.548,55.905 191.548,51.352 v1@192.3,50.6
  Top Layer w0.28: U4.4 180.5,14.5 180.2,14.8 180.2,21.7 181,22.5 R27.2
  Bottom Layer w0.28: v1(189.9,22.5) 188.3,24.1 188.3,29.1 192.3,33.1 v1(192.3,50.5)
P0.23: R28.2 U1.28 U4.3 | length 57.6
  Top Layer w0.152: U1.28 191.044,56.84 191.855,56.029 191.855,51.745 v1@193,50.6
  Top Layer w0.28: U4.3 180.1,14 179.4,14.7 179.4,23.8 180.9,25.3 R28.2
  Bottom Layer w0.28: v1(189.9,25.3) 188.9,26.3 188.9,28.8 193.1,33 v1(193.1,50.5)
P0.24: R26.2 U1.29 U4.7 | length 57.2
  Top Layer w0.152: U1.29 191.075,57.24 192.16,56.155 192.16,52.607 193.9,50.867 v1(193.9,50.5)
  Top Layer w0.28: U4.7 178.3,14.5 178.7,14.9 178.7,26.1 180.7,28.1 R26.2
  Bottom Layer w0.28: v1(189.9,28.1) 193.9,32.1 v1(193.9,50.5)
P0.25: C13.1 U1.37 | length 5.2
  Top Layer w0.152: 189.802,65.663 189.802,62.42 C13.1 189.864,61.517 U1.37
P0.26: C14.1 U1.38 | length 5.1
  Top Layer w0.152: 188.735,65.663 188.735,62.524 C14.1@189.294,61.965 ; C14.1@189.294,61.937 C14.1@189.294,61.965 ; U1.38 189.464,61.346 189.319,61.491 C14.1 C14.1@189.294,61.965
P0.27: U1.39 | length 5.1
  Top Layer w0.152: 188.43,65.663 188.43,61.937 189.064,61.303 U1.39
P0.28/AIN4: U1.40 | length 5
  Top Layer w0.152: 188.125,65.663 188.125,61.81 188.664,61.271 U1.40
P0.29/AIN5: U1.41 | length 5
  Top Layer w0.152: 187.821,65.663 187.821,61.683 188.264,61.24 U1.41
P0.30/AIN6: U1.42 | length 4.9
  Top Layer w0.152: 187.516,65.663 187.516,61.556 187.864,61.208 U1.42
P0.31/AIN7: U1.43 | length 4.9
  Top Layer w0.152: 187.211,65.663 187.211,61.429 187.464,61.176 U1.43
RF: L1.2 pad.0 | length 2.4
  Top Layer w0.762: L1.2@193.761,57.338 pad.0
SWDCLK: "NRF Prog.2" U1.25 | length 13.8
  Top Layer w0.152: U1.25 190.689,49.611 193.59,46.71 197.25,46.71
SWDIO: "NRF Prog.3" U1.26 | length 18.5
  Top Layer w0.152: U1.26 190.979,56.04 191.243,55.776 191.243,50.357 193.6,48 198,48 198.7,47.3 198.7,45.62 197.25,44.17
VBAT: C21.2 C22.2 C23.2 C24.2 P3.1 R14.1 U4.9 U4.10 U5.2 | length 24.4
  Top Layer w0.3: 192.95,7.15 U5.2
  Top Layer w0.6: 177.25,13.25 177.25,12.5 178.25,11.5 181.8,11.5 C21.2 181.85,10.55 P3.1 181.85,5.9 182.5,5.25 185.75,5.25 186.7,6.2 C24.2 R14.1@192.55,6.2
VCC: "MGC3130 Prog.2" "NRF Prog.1" C5.1 C8.1 C9.1 C15.2 C25.2 C26.2 C27.2 C28.2 C31.2 C32.2 C33.2 D1.1 D2.1 D3.1 R1.2 R2.2 R3.2 R9.2 R10.2 R15.2 R17.2 R22.1 R23.1 R24.1 R25.1 U1.13 U1.36 U1.48 U2.1 U2.28 U3.5 U5.9 | length 225.5
  Top Layer w0.229: v1(182.334,61.517) 182.417,61.517 183.094,60.84 U1.48@185.454,60.84 ; v1(185.277,52.938) 185.464,53.125 U1.13
  Top Layer w0.254: U1.36@190.689,60.075 190.689,60.531 191.707,61.548 C8.1 191.707,61.836 191.013,61.836 v1(190.995,61.853)
  Top Layer w0.28: U2.1 U2.28 169.525,62.125 170.25,62.85 ; v1(186.25,46.5) 186.25,45 186.5,44.75 U3.5 ; U5.9 v1@192.95,13.6
  Top Layer w0.3: v1(195.2,5.175) 195.625,4.75
  Top Layer w0.5: v1(187,13.75) C26.2@188.45,13.75 ; C26.2 C27.2 C28.2 C31.2 C32.2 C33.2 ; 195.625,4.75 R15.2
  Top Layer w0.6: 170.25,62.85 R1.2 174.4,62.85 v1(174.75,62.5) 175.5,61.75 R2.2 ; D2.1 v1(197.15,25.3) D1.1
  Bottom Layer w0.254: v1(182.334,61.517) 182.658,61.193 190.335,61.193 v1(190.995,61.853)
  Bottom Layer w0.381: v1(182.334,61.517) 182.334,59.279 183.957,57.656 183.957,54.257 v1(185.277,52.938) 188.862,52.938 191,50.8
  Bottom Layer w0.5: v1(193,13.75) 195.2,11.55 v1(195.2,5.175)
  Bottom Layer w0.6: R22.1 R23.1 R24.1 R25.1 181.65,47.4 ; 183.75,46.5 v1(186.25,46.5) v1(190.5,46.5) 191,47 191,50.8 192.1,51.9 195.8,51.9 197.25,50.45 197.25,49.25 ; 186.45,19.4 196,19.4 197.15,20.55 v1(197.15,25.3)
  Bottom Layer w2.5: 174.3,110.25 174.3,54.1 182.75,45.65 182.75,32.75 186.25,29.25 186.25,25.3 186.25,13.75
  other v1: 175.5,55.25
XC1: C1.1 U1.34 X1.1 | length 8
  Top Layer w0.152: U1.34 191.013,59.24 191.548,59.774 191.548,60.443 192.12,61.015 194.12,61.015 194.374,61.269 194.374,62.387 194.924,62.937 C1.1
XC2: C2.1 U1.35 X1.3 | length 4.5
  Top Layer w0.152: U1.35 190.979,59.64 191.243,59.904 191.243,60.581 191.982,61.32 192.418,61.32 192.595,61.497 C2.1@192.595,61.93 ; C2.1@192.545,61.937 X1.3@193.501,61.937
pads on no net: P3. U1.44 U1.47 U2. U2.2 U2.16 U2.17 U2.18 U2.22 U2.23 U2.26

## Polygon pours and split planes (outlines as drawn)
NetCENTER1_1 on Top Layer "Top Layer-No Net" (hatched 45Degree grid 8.333 track 0.25, pour order 1002): 19.988,98.854 147.988,98.854 147.988,20.154 19.988,20.154
GND on Top Layer "Top_Layer-GND" (solid, remove dead copper, pour order 1000): 169,0.5 199.5,0.5 199.5,54.75 196.5,54.75 196.5,60.5 199.5,60.5 199.5,119.5 168.811,119.5 169,58 170.5,58 170.5,51.75 169.5,51.75 169.5,50.5 169,50.5
NetTRANSMIT1_1 on Bottom Layer "Top Layer-No Net" (hatched 45Degree grid 0.5 track 0.25, pour order 1006): 19.988,98.854 147.988,98.854 147.988,20.154 19.988,20.154
NetTRANSMIT1_1 on Bottom Layer "Top Layer-No Net" (hatched 45Degree grid 1.25 track 0.25, pour order 1004): 0.488,119.504 168.488,119.504 168.488,0.504 0.488,0.504
GND on Bottom Layer "Bottom_Layer-GND" (solid, remove dead copper, pour order 1001): 169.056,0.444 199.556,0.444 199.556,54.75 196.5,54.75 196.5,60.5 199.556,60.5 199.556,119.556 169.056,119.556

## Other copper
Top Layer:
  region net VBAT: 193.1,5.95 193.05,5.9 191.75,5.9 191.75,6.475 192.8,7.525 193.1,7.525
  region net NetL2_2: 192.55,11.05 192.55,12.15 192.15,12.55 190.95,12.55 190.95,11.05 192.05,11.05
  region net NetL2_1: 192.55,8.85 192.55,7.85 191.95,7.25 190.85,7.25 190.85,8.75 192.05,8.75 192.15,8.85
  pour cut-out: 193.379,56.24 190.636,56.24 190.636,59.135 193.379,59.135

## Silkscreen, mask and mechanical layers (free items; w line width, h text height)
Top Overlay:
  text "MCLR" at 184.2,75.2 h0.69 r270
  text "GND" at 176.5,75 h0.69 r270
  text "SDA" at 179,75 h0.69 r270
  text "SCL" at 181.6,75 h0.69 r270
  text "TS" at 171.3,74.9 h0.69 r270
  text "VCC" at 173.9,74.9 h0.69 r270
  text "VCC" at 193.7,48.9 h0.69
  text "SWDCLK" at 191.6,46.4 h0.69
  text "SWDIO" at 192.4,43.8 h0.69
  text "RESET" at 192.1,41 h0.69
  text "GND" at 193.5,38.7 h0.69
  text "GND" at 174.25,1.75 h0.69